# EAGLE board devboard_kw2xd_v2.1 (EAGLE 8.4.1)
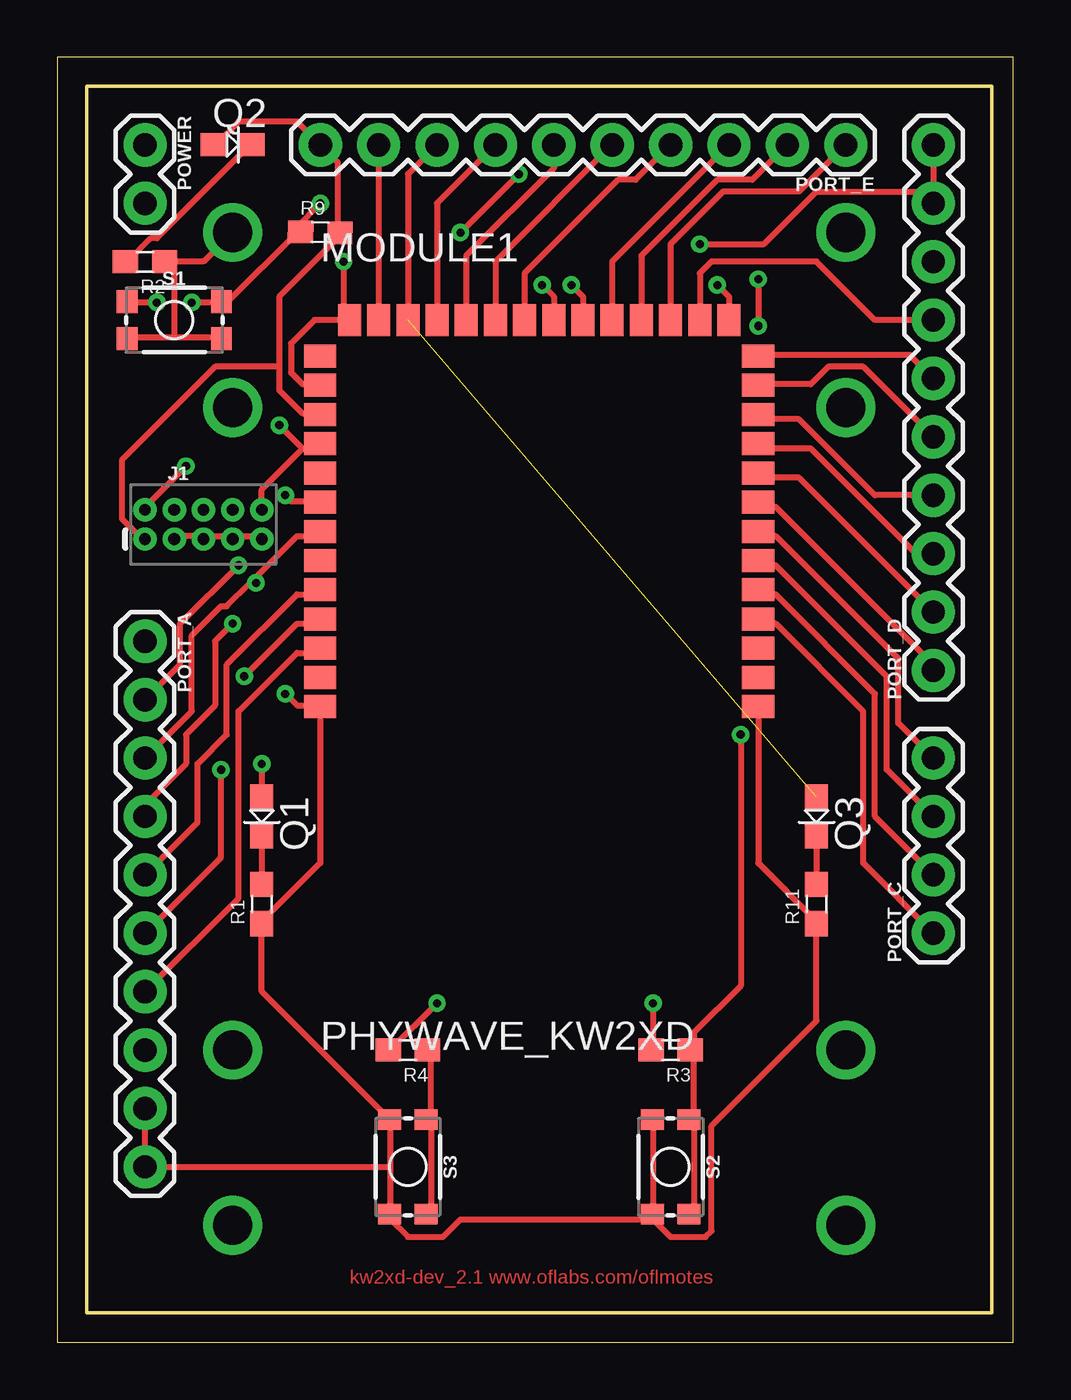
[diagram p0: board, top side]
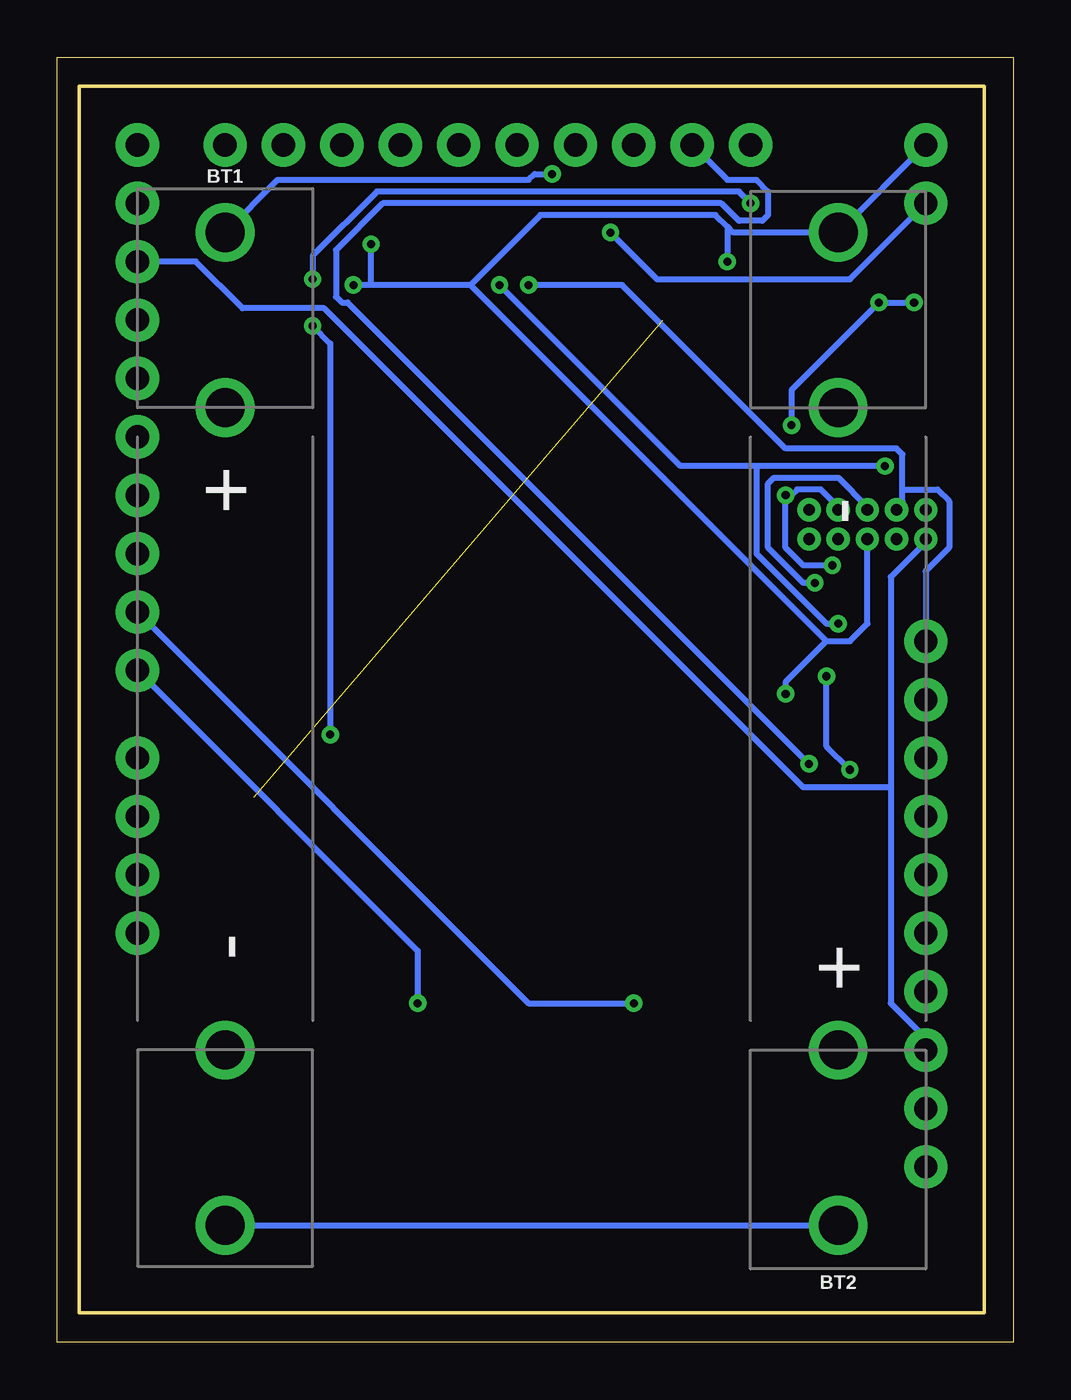
[diagram p1: board, bottom side, seen from below]

Size 41.58 x 55.87 mm. Coordinates in mm from the lower left corner, seen from the top.
Outline: 0,0 41.58,0 41.58,55.87 0,55.87 0,0
Outline: 1.27,54.61 40.64,54.61 40.64,1.27 1.27,1.27 1.27,54.61
Copper layers (1*16): Top 0.035mm / dielectric 1.5mm / Bottom 0.035mm
Design rules "default *": minimum track width 10mil, minimum drill 0.35mm, track to track 10mil, track to pad 10mil, pad to pad 10mil, via to via 10mil, smd to smd 10mil, copper to edge 40mil, drill to drill 10mil, minimum pad ring 10mil, minimum via ring 8mil, stop-mask expansion 4mil, vias tented up to drill 0mil, thermal gap 10mil
tKeepout: area 12.2,16.9 to 29.7,43.7; area 12.2,16.9 to 29.7,43.7; area 14.7,18.2 to 32.3,45
tRestrict: area 12.7,15.2 to 29.2,43.2

## Footprints (pad centres in the part's own frame; a part is rotated, then mirrored left to right if it is on the bottom)
BATTERY-AAA = drill 1.702: GND@1 21.59,0; GND@2 13.97,0; PWR@1 -21.59,0; PWR@2 -13.97,0
2X5-PTH-1.27MM = drill 0.508 pad 1: 1 -2.54,-0.635; 2 -2.54,0.635; 3 -1.27,-0.635; 4 -1.27,0.635; 5 0,-0.635; 6 0,0.635; 7 1.27,-0.635; 8 1.27,0.635; 9 2.54,-0.635; 10 2.54,0.635
PHYWAVE_KW2XD = smd 1.4 x 1: 1 19.05,-0.3; 2 19.05,0.97; 3 19.05,2.24; 4 19.05,3.51; 5 19.05,4.78; 6 19.05,6.05; 7 19.05,7.32; 8 19.05,8.59; 9 19.05,9.86; 10 19.05,11.13; 11 19.05,12.4; 12 19.05,13.67; 13 19.05,14.94; 28 0,14.94; 29 0,13.67; 30 0,12.4; 31 0,11.13; 32 0,9.86; 33 0,8.59; 34 0,7.32; 35 0,6.05; 36 0,4.78; 37 0,3.51; 38 0,2.24; 39 0,0.97; 40 0,-0.3 | smd 1 x 1.4: 14 17.78,16.51; 15 16.51,16.51; 16 15.24,16.51; 17 13.97,16.51; 18 12.7,16.51; 19 11.43,16.51; 20 10.16,16.51; 21 8.89,16.51; 22 7.62,16.51; 23 6.35,16.51; 24 5.08,16.51; 25 3.81,16.51; 26 2.54,16.51; 27 1.27,16.51
1X10 = drill 1.016 pad 1.88: 1 0,0; 2 2.54,0; 3 5.08,0; 4 7.62,0; 5 10.16,0; 6 12.7,0; 7 15.24,0; 8 17.78,0; 9 20.32,0; 10 22.86,0
1X04 = drill 1.016 pad 1.88: 1 0,0; 2 2.54,0; 3 5.08,0; 4 7.62,0
1X02 = drill 1.016 pad 1.88: 1 0,0; 2 2.54,0
LED0603 = smd 1.1 x 1: A -0.85,0; C 0.85,0
SMD0603 = smd 1.1 x 1: 1 -0.85,0; 2 0.85,0
TACTILE_SWITCH_SMD_4.6X2.8MM = smd 0.9 x 1: 1 -2.05,-0.8; 2 2.05,-0.8; 3 2.05,0.8; 4 -2.05,0.8

## Placement (x,y rotation side)
BT1  [BATTERY-AAA]  34.29,26.67 270 bottom
BT2  [BATTERY-AAA]  7.62,26.67 90 bottom
J1  CORTEX_DEBUG_PTH  [2X5-PTH-1.27MM]  6.35,35.56 0 top
MODULE1  PHYWAVE_KW2XD  [PHYWAVE_KW2XD]  11.43,27.94 0 top
PORT_A  [1X10]  3.81,30.48 270 top
PORT_C  [1X04]  38.1,17.78 90 top
PORT_D  [1X10]  38.1,29.21 90 top
PORT_E  [1X10]  34.29,52.07 180 top
POWER  [1X02]  3.81,52.07 270 top
Q1  RED  [LED0603]  8.89,22.86 270 top
Q2  RED  [LED0603]  7.62,52.07 0 top
Q3  GREEN  [LED0603]  33.02,22.86 270 top
R1  220  [SMD0603]  8.89,19.05 90 top
R2  220  [SMD0603]  3.81,46.99 180 top
R3  56k  [SMD0603]  26.67,12.7 180 top
R4  56k  [SMD0603]  15.24,12.7 180 top
R9  56k  [SMD0603]  11.43,48.26 358.8 top
R11  220  [SMD0603]  33.02,19.05 90 top
S1  RESET  [TACTILE_SWITCH_SMD_4.6X2.8MM]  5.08,44.45 0 top
S2  KEY1  [TACTILE_SWITCH_SMD_4.6X2.8MM]  26.67,7.62 270 top
S3  KEY2  [TACTILE_SWITCH_SMD_4.6X2.8MM]  15.24,7.62 270 top

## Library data of the parts
BT1 BT2 = SparkFun-Batteries; PROD_ID: BATT-08571; SF_SKU: PRT-12718
J1 POWER = SparkFun-Connectors
MODULE1 = oflabs-phytec
PORT_A PORT_D PORT_E = SparkFun-Connectors; PROD_ID: CONN-11563
PORT_C = SparkFun-Connectors; PROD_ID: CONN-09696
Q1-Q3 R1-R4 R9 R11 = parts
S1-S3 = SparkFun-Switches; PROD_ID: SWCH-13065

## Nets
GND: BT2.GND@1 J1.3 J1.5 J1.7 J1.9 MODULE1.1 MODULE1.14 MODULE1.27 MODULE1.29 MODULE1.40 PORT_A.9 PORT_A.10 PORT_D.9 PORT_D.10 POWER.1 R1.1 R2.1 R11.1 S1.1 S1.2 S2.1 S2.2 S3.1 S3.2
N$1: Q1.C R1.2
N$2: Q2.C R2.2
N$3: BT1.GND@1 BT2.PWR@1
N$20: Q3.C R11.2
NRST: J1.10 MODULE1.31 R3.1 R9.1 S1.3 S1.4 S2.3 S2.4
NRST1: R4.1 S3.3 S3.4
PTA0_SWDCLK: J1.4 MODULE1.20 PORT_A.1
PTA1_TDI: J1.8 MODULE1.33 PORT_A.2
PTA2_SWO: J1.6 MODULE1.34 PORT_A.3
PTA3_SWDIO: J1.2 MODULE1.19 PORT_A.4
PTA4: MODULE1.36 PORT_A.5
PTA18: MODULE1.37 PORT_A.6
PTA19: MODULE1.38 PORT_A.7
PTC4: MODULE1.4 PORT_C.1
PTC5: MODULE1.5 PORT_C.2
PTC6: MODULE1.6 PORT_C.3
PTC7: MODULE1.7 PORT_C.4
PTD1: MODULE1.8 PORT_D.1 R3.2
PTD2: MODULE1.9 PORT_D.2 R4.2
PTD3: MODULE1.10 PORT_D.3
PTD4: MODULE1.11 PORT_D.4
PTD5: MODULE1.12 PORT_D.5
PTD6: MODULE1.13 PORT_D.6
PTD7: MODULE1.15 PORT_D.7
PTE0: MODULE1.16 PORT_E.1
PTE1: MODULE1.17 PORT_E.2
PTE2: MODULE1.18 PORT_E.3
PTE3: MODULE1.21 PORT_E.4
PTE4: MODULE1.22 PORT_E.5
PTE16: MODULE1.23 PORT_E.6
PTE17: MODULE1.24 PORT_E.7
PTE18: MODULE1.25 PORT_E.8 Q3.A
PTE19: MODULE1.26 PORT_E.9 Q1.A
VBAT: BT1.PWR@1 POWER.2
VCC: J1.1 MODULE1.30 PORT_A.8 PORT_D.8 PORT_E.10 Q2.A R9.2

## Tracks (layer width: path | path; a pad name or v marks a point on that pad's centre or on a via)
GND  (via drill 0.35)
  Top 0.254: MODULE1.1 30.48,20.83 33.02,18.29 R11.1 33.02,13.97 28.45,9.4 28.45,4.83 28.19,4.57 26.67,4.57 25.91,5.33 S2.2 | S2.2 25.91,5.59 25.91,9.65 S2.1 | 14.48,7.62 14.48,9.65 S3.1 14.22,9.91 8.89,15.24 R1.1 8.89,18.29 11.43,20.83 MODULE1.40 11.43,27.69 10.41,27.69 v9.91,28.19 | 14.48,7.62 14.48,5.59 S3.2 14.48,5.33 15.24,4.57 16.76,4.57 17.53,5.33 25.65,5.33 S2.2 | 14.48,7.62 PORT_A.10 PORT_A.9 | PORT_D.10 38.1,50.04 | 6.35,35.05 5.08,35.05 J1.3 | 6.35,35.05 7.62,35.05 | 6.35,35.05 J1.5 | 7.62,35.05 8.89,35.05 J1.9 | 7.62,35.05 J1.7 | 12.45,44.45 11.18,44.45 10.16,43.43 10.16,42.16 10.67,41.66 11.43,41.66 MODULE1.29 | 5.08,43.69 7.11,43.69 S1.2 | 5.08,43.69 3.05,43.69 S1.1 | 5.08,46.99 6.35,46.99 BT2.GND@1 | MODULE1.14 29.21,45.47 v28.7,45.97 | 5.08,46.99 5.08,43.69 | 5.08,46.99 R2.1 | v12.45,46.99 12.45,44.45 | 12.45,44.45 MODULE1.27 | 38.1,50.04 33.02,50.04 30.73,47.75 v27.94,47.75 | 38.1,50.04 PORT_D.9
  Bottom 0.254: 23.62,45.97 27.94,45.97 | 27.94,45.97 v28.7,45.97 | 23.62,45.97 20.57,49.02 12.95,49.02 12.45,48.51 | 12.45,48.51 12.19,48.26 BT2.GND@1 POWER.1 | 12.45,48.51 v12.45,46.99 | J1.5 6.35,31.24 7.11,30.48 8.13,30.48 | 23.62,45.97 8.13,30.48 | 27.94,45.97 v27.94,47.75 | v9.91,28.19 9.91,28.7 8.13,30.48
N$1
  Top 0.254: Q1.C R1.2
N$2
  Top 0.254: R2.2 3.05,46.99 4.06,48.01 4.32,48.01 8.38,52.07 Q2.C
N$3
  Bottom 0.254: BT1.GND@1 BT2.PWR@1
N$20
  Top 0.254: Q3.C R11.2
NRST  (via drill 0.35)
  Top 0.254: 10.67,38.86 11.43,38.86 MODULE1.31 | 10.67,38.86 8.89,37.08 J1.10 | S2.3 27.69,5.59 27.69,9.65 S2.4 27.69,9.91 27.69,12.7 | v4.32,45.21 3.05,45.21 S1.4 | v5.84,45.21 7.11,45.21 S1.3 7.37,45.21 10.41,48.26 R9.1 10.41,48.51 v11.43,49.53 | 27.69,12.7 27.69,13.46 29.72,15.49 v29.72,26.42 | v30.48,46.23 v30.48,44.2 | 27.69,12.7 R3.1 | v9.65,39.88 10.67,38.86
  Bottom 0.254: v4.32,45.21 v5.84,45.21 9.65,41.4 v9.65,39.88 | v29.72,26.42 29.72,43.43 v30.48,44.2 | v30.48,46.23 30.48,47.24 27.69,50.04 11.94,50.04 v11.43,49.53
NRST1
  Top 0.254: S3.3 16.26,5.59 16.26,9.65 S3.4 16.26,9.91 16.26,12.7 R4.1
PTA0_SWDCLK  (via drill 0.35)
  Top 0.254: MODULE1.20 21.59,45.47 v21.08,45.97
  Bottom 0.254: v21.08,45.97 17.02,45.97 9.91,38.86 5.08,38.86 4.83,38.61 4.83,37.08 | 4.83,37.08 4.83,36.58 5.08,36.32 J1.4 | PORT_A.1 3.81,33.53 2.79,34.54 2.79,36.58 3.3,37.08 4.83,37.08
PTA1_TDI  (via drill 0.35)
  Top 0.254: v9.91,36.83 10.16,36.58 11.43,36.58 MODULE1.33 | v7.87,33.78 5.33,31.24 5.33,29.46 PORT_A.2
  Bottom 0.254: J1.8 7.62,36.32 8.38,37.08 9.4,37.08 9.65,36.83 v9.91,36.83 9.91,34.54 9.14,33.78 v7.87,33.78
PTA2_SWO  (via drill 0.35)
  Top 0.254: 8.38,33.02 7.37,32 7.11,32 5.84,30.73 5.84,27.43 PORT_A.3 | 8.38,33.02 10.41,35.05 11.43,35.05 MODULE1.34 | 8.38,33.02 v8.64,33.02
  Bottom 0.254: v8.64,33.02 9.14,33.02 10.67,34.54 10.67,37.34 10.41,37.59 7.62,37.59 6.35,36.32 J1.6
PTA3_SWDIO  (via drill 0.35)
  Top 0.254: MODULE1.19 22.86,45.47 v22.35,45.97 | v5.59,38.1 3.81,36.32 J1.2 | PORT_A.4 3.81,23.37 5.59,25.15 5.59,26.42 6.86,27.69 6.86,30.48 v7.62,31.24
  Bottom 0.254: v22.35,45.97 14.48,38.1 11.18,38.1 | v5.59,38.1 11.18,38.1 | v7.62,31.24 8.13,31.24 11.18,34.29 11.18,38.1
PTA4
  Top 0.254: PORT_A.5 6.1,22.61 6.1,25.15 7.37,26.42 7.37,29.46 10.41,32.51 11.43,32.51 MODULE1.36
PTA18  (via drill 0.35)
  Top 0.254: v8.13,28.96 10.41,31.24 11.43,31.24 MODULE1.37 | v7.11,24.89 7.11,21.08 PORT_A.6
  Bottom 0.254: v8.13,28.96 8.13,25.91 v7.11,24.89
PTA19
  Top 0.254: PORT_A.7 7.87,19.3 7.87,27.43 10.41,29.97 11.43,29.97 MODULE1.38
PTC4
  Top 0.254: PORT_C.1 35.05,20.83 35.05,27.43 31.24,31.24 30.48,31.24 MODULE1.4
PTC5
  Top 0.254: PORT_C.2 35.56,22.86 35.56,28.19 31.24,32.51 30.48,32.51 MODULE1.5
PTC6
  Top 0.254: PORT_C.3 36.07,24.89 36.07,28.96 31.24,33.78 30.48,33.78 MODULE1.6
PTC7
  Top 0.254: PORT_C.4 36.58,26.92 36.58,29.72 31.24,35.05 30.48,35.05 MODULE1.7
PTD1  (via drill 0.35)
  Top 0.254: v25.91,14.73 25.91,12.7 R3.2 | PORT_D.1 38.1,29.46 31.24,36.32 30.48,36.32 MODULE1.8
  Bottom 0.254: v25.91,14.73 25.91,17.02 PORT_D.1
PTD2  (via drill 0.35)
  Top 0.254: v16.51,14.73 14.48,12.7 R4.2 | PORT_D.2 32.26,37.59 30.48,37.59 MODULE1.9
  Bottom 0.254: v16.51,14.73 21.08,14.73 PORT_D.2
PTD3
  Top 0.254: PORT_D.3 37.34,34.29 32.77,38.86 30.48,38.86 MODULE1.10
PTD4
  Top 0.254: PORT_D.4 35.56,36.83 32.26,40.13 30.48,40.13 MODULE1.11
PTD5
  Top 0.254: PORT_D.5 35.05,42.42 33.53,42.42 32.77,41.66 30.48,41.66 MODULE1.12
PTD6
  Top 0.254: PORT_D.6 37.08,42.93 30.48,42.93 MODULE1.13
PTD7
  Top 0.254: MODULE1.15 27.94,46.48 28.45,46.99 33.02,46.99 35.56,44.45 PORT_D.7
PTE0
  Top 0.254: MODULE1.16 26.67,47.75 28.96,50.04 32.26,50.04 PORT_E.1
PTE1
  Top 0.254: MODULE1.17 25.4,47.24 28.7,50.55 30.23,50.55 PORT_E.2
PTE2
  Top 0.254: MODULE1.18 24.13,46.99 PORT_E.3
PTE3
  Top 0.254: MODULE1.21 20.32,46.48 24.38,50.55 25.15,50.55 PORT_E.4
PTE4
  Top 0.254: MODULE1.22 19.05,46.99 PORT_E.5
PTE16
  Top 0.254: MODULE1.23 17.78,47.24 21.59,51.05 PORT_E.6
PTE17
  Top 0.254: MODULE1.24 16.51,49.53 PORT_E.7
PTE18  (1 unrouted)
  Top 0.254: MODULE1.25 15.24,50.8 PORT_E.8
PTE19  (via drill 0.35)
  Top 0.254: v8.89,25.15 Q1.A | PORT_E.9 MODULE1.26
  Bottom 0.254: v8.89,25.15 28.96,45.21 29.21,45.21 29.46,45.47 29.46,47.5 27.43,49.53 12.7,49.53 11.94,48.77 10.92,48.77 10.67,49.02 10.67,50.04 11.18,50.55 12.45,50.55 PORT_E.9
VBAT  (via drill 0.35)
  Top 0.254: v20.07,50.8 v17.53,48.26
  Bottom 0.254: POWER.2 7.11,46.23 15.49,46.23 v17.53,48.26 | v20.07,50.8 20.83,50.8 21.08,50.55 32,50.55 BT1.PWR@1
VCC
  Top 0.254: Q2.A 6.86,52.07 7.87,53.09 10.41,53.09 PORT_E.10 12.19,51.31 12.19,48.26 R9.2 12.19,48.01 9.65,45.47 9.65,42.42 | 9.65,42.42 9.65,41.4 10.67,40.39 11.43,40.39 MODULE1.30 | 9.65,42.42 6.86,42.42 2.79,38.35 2.79,35.81 3.56,35.05 3.81,35.05 J1.1
  Bottom 0.254: PORT_A.8 3.81,13.21 5.33,14.73 5.33,24.13 | 5.33,24.13 5.33,33.27 3.81,34.8 J1.1 | PORT_D.8 35.56,46.99 33.53,44.96 29.97,44.96 9.14,24.13 5.33,24.13

## Text on the board
Top: kw2xd-dev_2.1 www.oflabs.com/oflmotes